# Altium PCB AVR8.PcbDoc
Units mm, origin at the board's own origin, x right, y up, seen from the top; angles counter-clockwise.
Board outline 57.78 x 81.01 mm, 2 copper layers (Top Layer, Bottom Layer); 57 components, 58 nets, 205 pads, 57 vias.
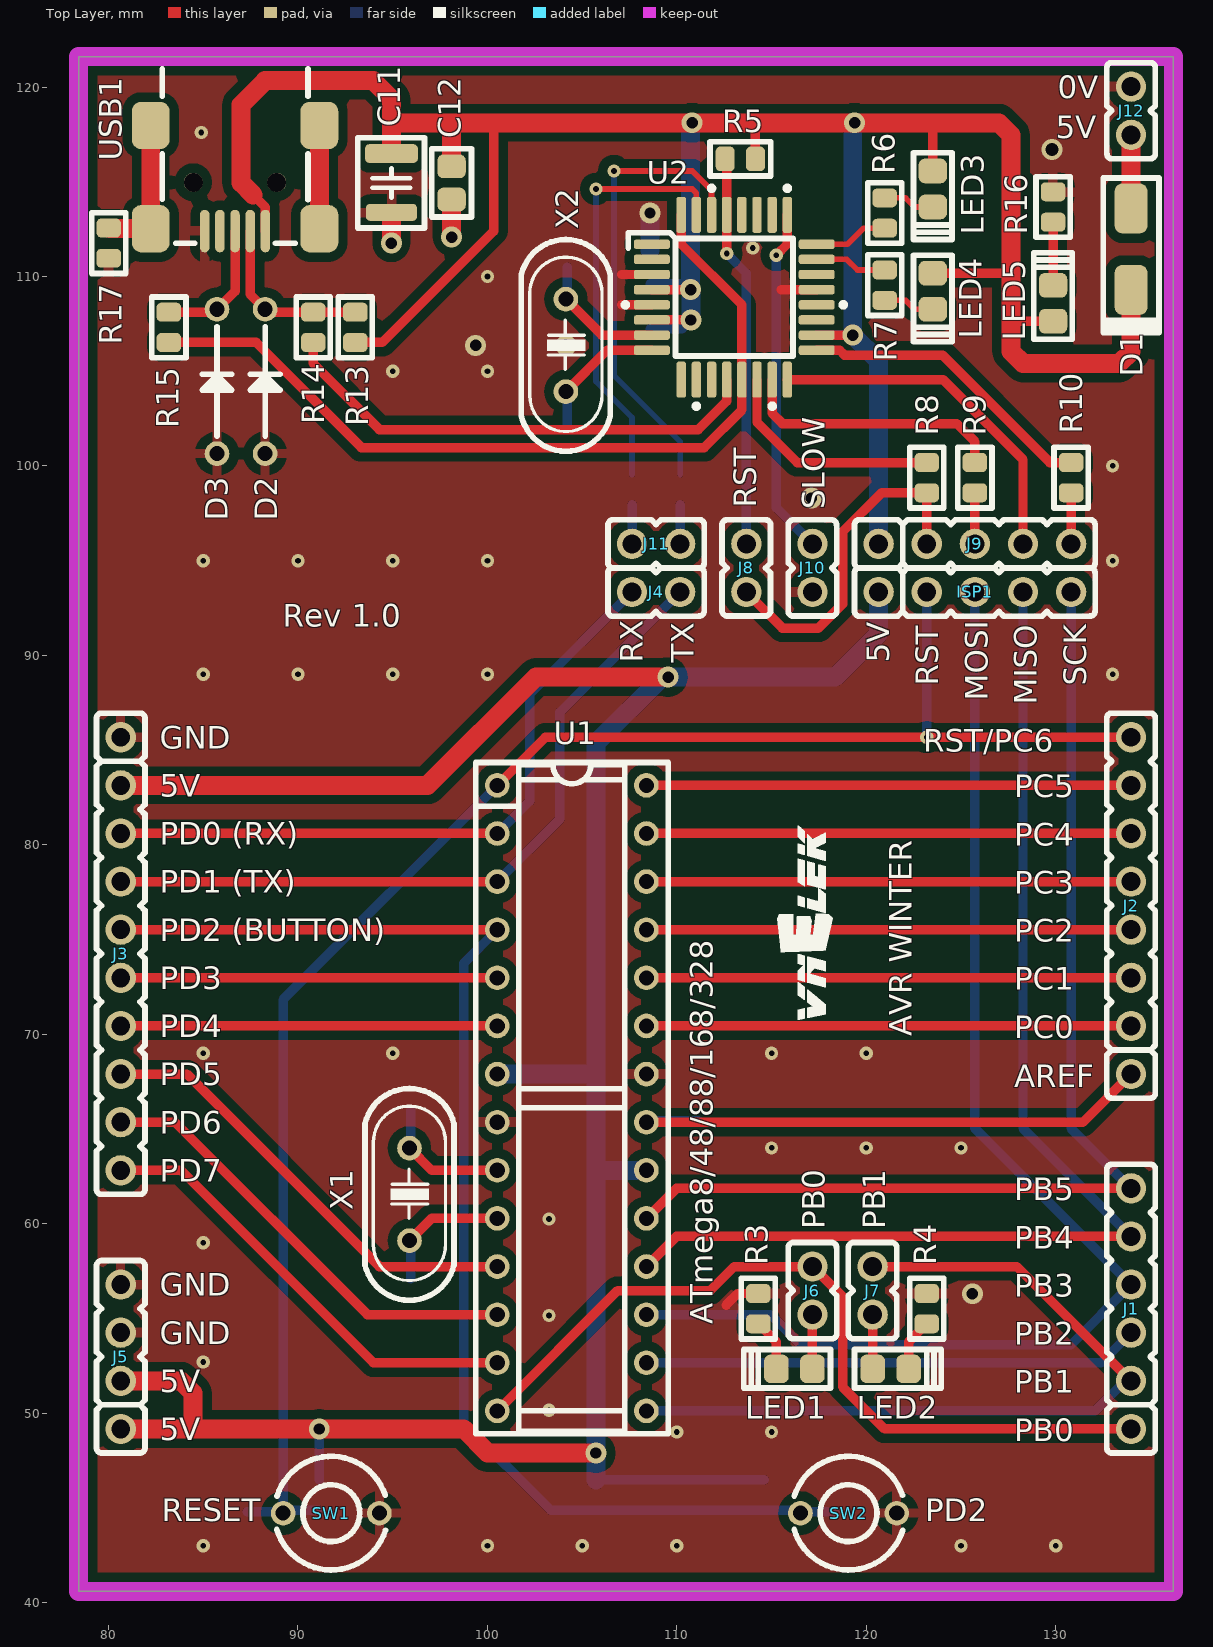
[diagram p0: Top Layer view]
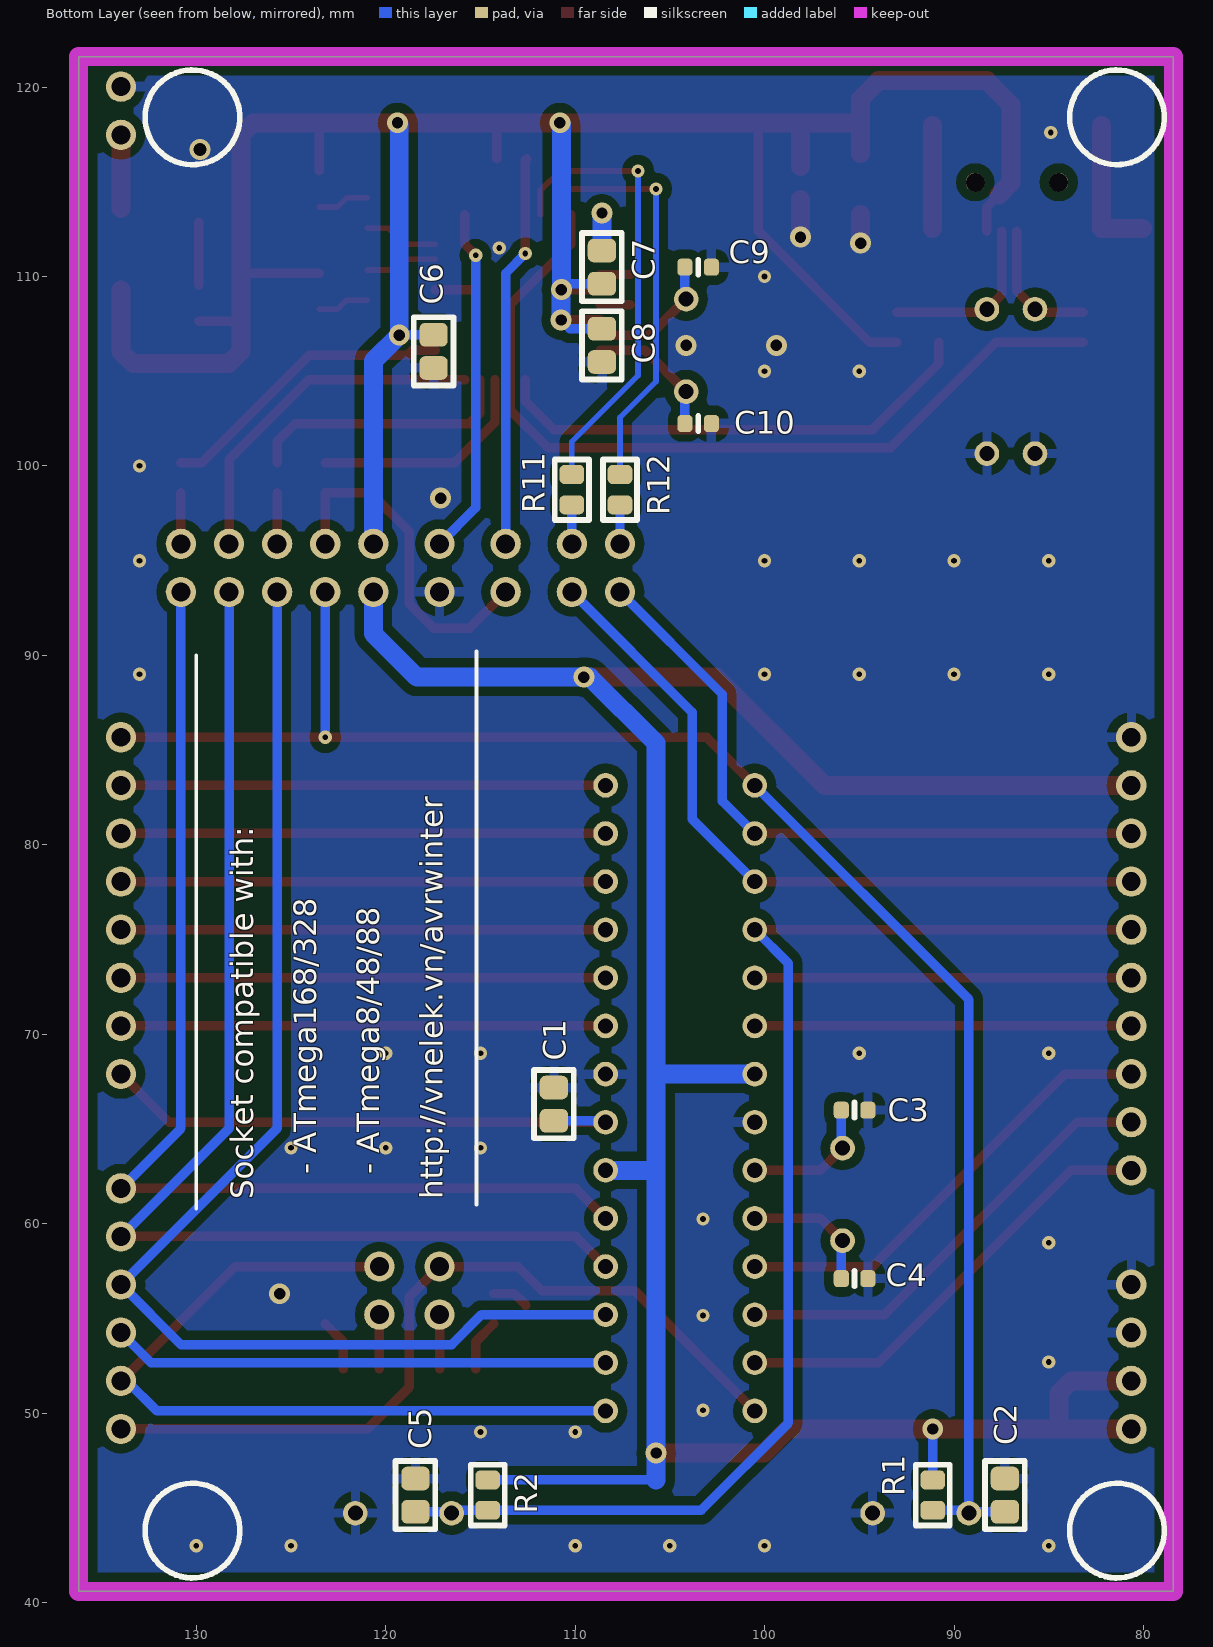
[diagram p1: Bottom Layer view, seen from below]
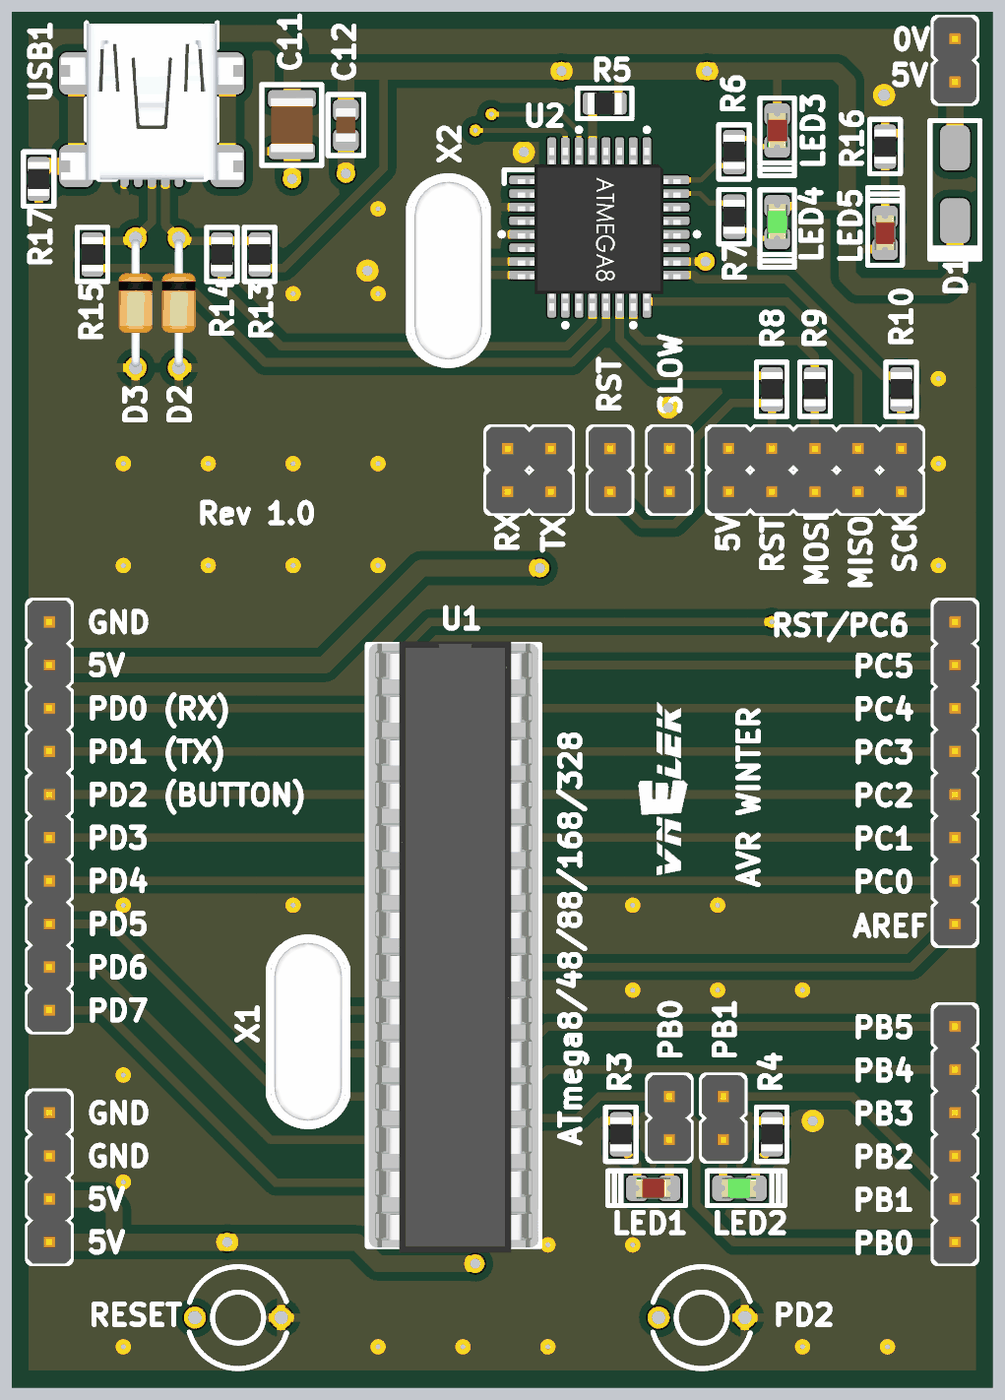
[diagram p2: 3D render of the assembled board from above, using the file's embedded part models]
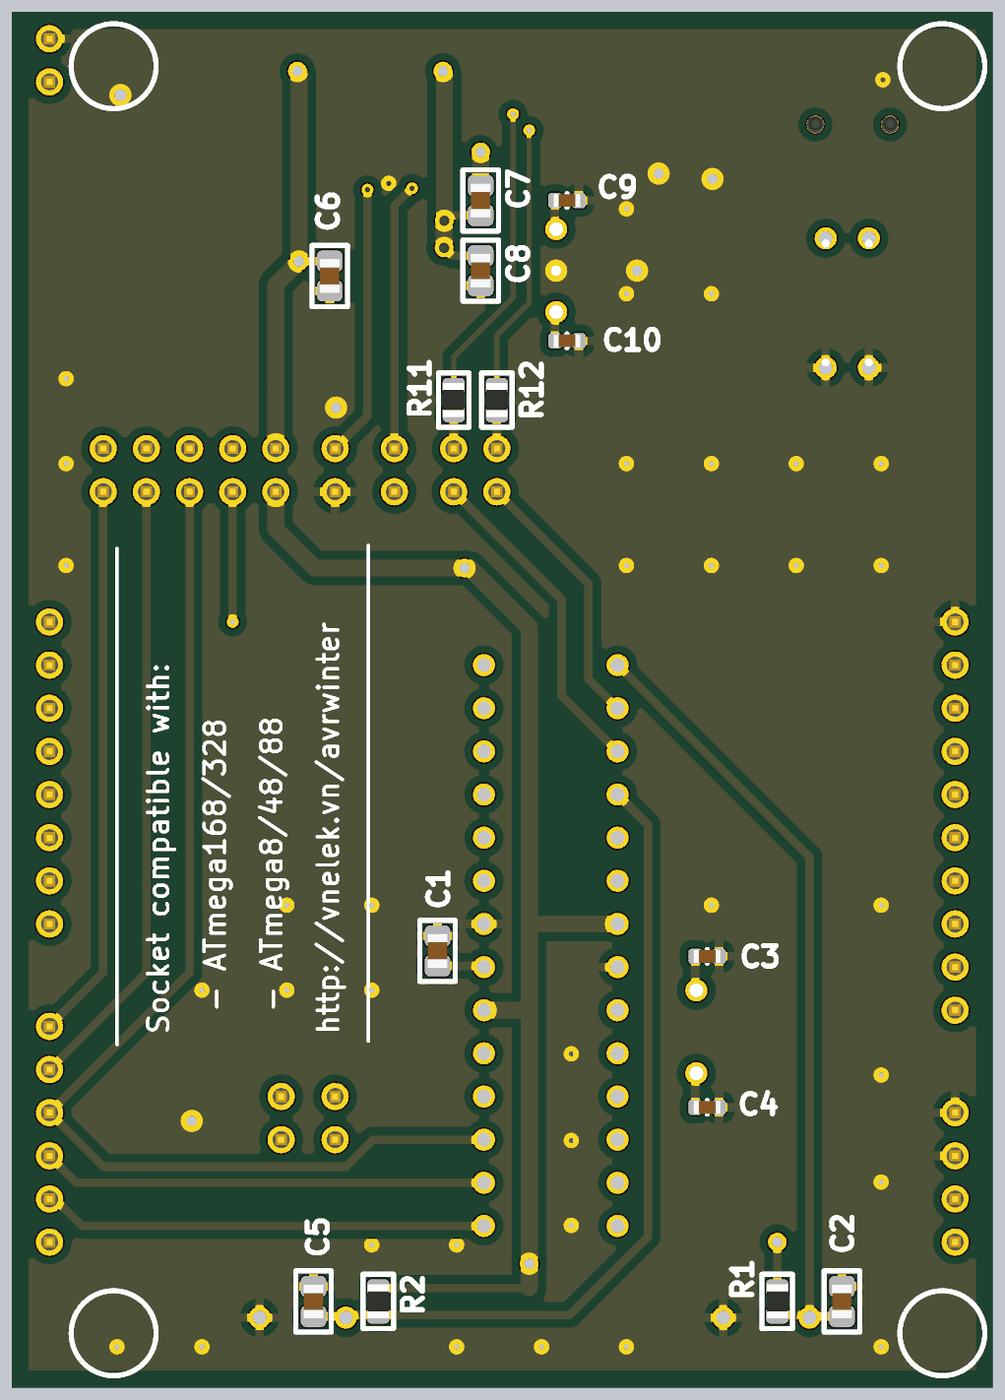
[diagram p3: 3D render of the assembled board from below, using the file's embedded part models]

## Layer stack, top to bottom
Top Layer: signal copper 0.0356
Dielectric: dielectric 0.32, FR-4, Dk 4.8
Bottom Layer: signal copper 0.0356

## Board outline
78.422,40.592 136.207,40.592 136.207,121.602 78.422,121.602

## Design rules (kind name [scope] priority, off if disabled: settings)
Clearance [All] p1: gap=0.5
PlaneClearance [All] p1: clearance=0.5
PlaneConnect [All] p1: planeconnectstyle=Relief reliefexpansion=0.5 reliefentries=4 reliefconductorwidth=0.5 reliefairgap=0.3
PolygonConnect PolygonConnect_1 [isvia] p1: connectstyle=Direct reliefconductorwidth=0.5 reliefentries=4 polygonreliefangle="90 Angle"
PolygonConnect [All] p2: connectstyle=Relief reliefconductorwidth=0.5 reliefentries=4 polygonreliefangle="90 Angle"
RoutingVias [All] p1: holewidth=0.3 width=0.7 viastyle="Through Hole" minholewidth=0.3 minwidth=0.7 maxholewidth=0.6 maxwidth=1.1
SilkscreenOverComponentPads SilkToSolderMaskClearance [IsPad] p1: minsilkscreentomaskgap=0.254
SolderMaskExpansion [All] p1: expansion=0.102
Width [All] p1: maxlimit=1 minlimit=0.3 preferedwidth=0.5
25 further rules are at their usual default settings.

## Classes and differential pairs
component class "AVR8 RedBoard": C1 C2 C3 C4 C5 ISP1 J1 J2 J3 J4 J5 J6 J7 LED1 LED2 R1 R2 R3 R4 SW1 SW2 U1 X1
component class "AVR Programmer": C6 C7 C8 C9 C10 C11 C12 D1 D2 D3 J8 J9 J10 J11 J12 LED3 LED4 LED5 R5 R6 R7 R8 R9 R10 R11 R12 R13 R14 R15 R16 R17 U2 USB1 X2

## Components (designator, comment, footprint, x,y, rotation, side; value= is the part's Value field where it differs from the comment)
C1 "100nF" C0805 111.125,66.31 r270 bottom
C2 "100nF" C0805 87.312,45.672 r90 bottom
C3 "22pF" C0603 95.25,65.992 r0 bottom
C4 "22pF" C0603 95.25,57.102 r0 bottom
C5 "100nF" C0805 118.427,45.672 r90 bottom
C6 "104" C0805 117.475,106.045 r90 bottom
C7 "104" C0805 108.585,110.49 r270 bottom
C8 "104" C0805 108.585,106.362 r90 bottom
C9 "22pF" C0603 103.505,110.49 r0 bottom
C10 "22pF" C0603 103.505,102.235 r0 bottom
C11 "4.7uF" C1210 94.932,114.935 r270 top
C12 "104" C0805 98.108,114.935 r90 top
D1 "SS14" SS14 133.975,111.442 r270 top
D2 "3V6" 1N5226 88.265,104.457 r90 top
D3 "3V6" 1N5226 85.725,104.457 r90 top
ISP1 "ISP" Header_5 125.73,93.345 r0 top
J1 "PORTB" Header_6 133.976,55.515 r90 top
J2 "PORTC" Header_8 133.976,76.787 r90 top
J3 "PORTD" Header_10 80.645,74.247 r270 top
J4 "Serial" Header_2 108.902,93.345 r0 top
J5 "POWER" Header_4 80.645,52.975 r90 top
J6 "PB0" Header_2 117.157,56.467 r90 top
J7 "PB1" Header_2 120.332,56.467 r90 top
J8 "Update" Header_2 113.665,94.615 r270 top
J9 "ISP" Header_5 125.73,95.885 r0 top
J10 "Speed" Header_2 117.157,94.615 r90 top
J11 "Serial" Header_2 108.902,95.885 r180 top
J12 "5VDC" Header_2 133.975,118.745 r270 top
LED1 "RED" "Led 0805R" 116.205,52.34 r180 top
LED2 "GREEN" "Led 0805G" 121.285,52.34 r0 top
LED3 "RED" "Led 0805R" 123.507,114.617 r270 top
LED4 "GREEN" "Led 0805G" 123.507,109.22 r270 top
LED5 "RED" "Led 0805R" 129.857,108.585 r90 top
R1 "Res2" RESC2012(0805) 91.123,45.672 r90 bottom
R2 "Res2" RESC2012(0805) 114.617,45.672 r90 bottom
R3 "Res2" RESC2012(0805) 114.3,55.515 r90 top
R4 "Res2" RESC2012(0805) 123.19,55.515 r90 top
R5 "Res2" RESC2012(0805) 113.347,116.205 r0 top
R6 "Res2" RESC2012(0805) 120.968,113.347 r270 top
R7 "Res2" RESC2012(0805) 120.968,109.537 r90 top
R8 "Res2" RESC2012(0805) 123.19,99.377 r270 top
R9 "Res2" RESC2012(0805) 125.73,99.377 r270 top
R10 "Res2" RESC2012(0805) 130.81,99.377 r270 top
R11 "Res2" RESC2012(0805) 110.172,98.742 r270 bottom
R12 "Res2" RESC2012(0805) 107.632,98.742 r270 bottom
R13 "Res2" RESC2012(0805) 93.027,107.315 r90 top
R14 "Res2" RESC2012(0805) 90.805,107.315 r90 top
R15 "Res2" RESC2012(0805) 83.185,107.315 r90 top
R16 "Res2" RESC2012(0805) 129.857,113.665 r90 top
R17 "Res2" RESC2012(0805) 80.01,111.76 r270 top
SW1 "RESET" "BUTTON 2PIN TRON" 89.218,44.72 r0 top
SW2 "PD2" "BUTTON 2PIN TRON" 116.522,44.72 r0 top
U1 "ATmega8/48/88/168/328" SOCKET_28 104.457,66.627 r270 top
U2 "ATmega8-SMD" ATMEGA_8_SMD 113.03,108.902 r270 top
USB1 "USB_MINI" USBMNIB 86.677,112.395 r180 top
X1 "12Mhz" CRYSTAL 95.885,61.547 r270 top
X2 "12Mhz" CRYSTAL 104.14,106.362 r270 top

## Footprints (in the part's own frame and the unit in brackets; to place one, negate y for a bottom-side part, rotate by r counter-clockwise, add the part's x,y. Pads: shape width x height; smd on the part's side, far side on the other; paste and mask are expansions set on the pad)
1N5226 [mm] "DIODE_ZENER"
  round 1.3 hole 0.8 mask+0.1: 1(-3.81,0)
  round 1.3 hole 0.8: 2(3.81,0)
  silkscreen extent -2.88,-0.79 2.89,0.79, body extent -3.75,-1 3.75,1, height 2.5
ATMEGA_8_SMD [mm] "32A,32-lead, 7 x 7mm body size, 1.0mm body"
  rrect50% 0.5x1.9 smd mask+0.1: 1(-2.8,-4.35) 2(-2,-4.35) 3(-1.2,-4.35) 4(-0.4,-4.35) 5(0.4,-4.35) 6(1.2,-4.35) 7(2,-4.35) 8(2.8,-4.35) 17(2.8,4.35) 18(2,4.35) 19(1.2,4.35) 20(0.4,4.35) 21(-0.4,4.35) 22(-1.2,4.35) 23(-2,4.35) 24(-2.8,4.35)
  rrect50% 1.9x0.5 smd mask+0.1: 9(4.35,-2.8) 10(4.35,-2) 11(4.35,-1.2) 12(4.35,-0.4) 13(4.35,0.4) 14(4.35,1.2) 15(4.35,2) 16(4.35,2.8) 25(-4.35,2.8) 26(-4.35,2) 27(-4.35,1.2) 28(-4.35,0.4) 29(-4.35,-0.4) 30(-4.35,-1.2) 31(-4.35,-2) 32(-4.35,-2.8)
  silkscreen extent -5.85,-5.85 5.85,5.85, body extent -4.7,-4.81 4.9,4.79, height 1.1
"BUTTON 2PIN TRON" [mm] "PIN TO PIN 5.08, W=6MM"
  round 1.3 hole 0.8: 1(0,0) 2(5.08,0)
  silkscreen extent -0.33,-3 5.4,3
C0603 [mm] "Chip Capacitor, Body 1.6x0.8mm, 1608"
  rrect50% 0.8x0.9 smd: 1(-0.7,0) 2(0.7,0)
  silkscreen extent 0,-0.4 0,0.4, body extent -0.8,-0.4 0.8,0.4, height 0.6
C0805 [mm] "Chip Capacitor, 2-Leads, Body 2.0x1.3mm, IPC Medium Density"
  rrect50% 1.25x1.5 smd: 1(-0.875,0) 2(0.875,0)
  silkscreen extent -1.8,-1.05 1.8,1.05, body extent -1,-0.6 1,0.6, height 0.95
C1210 [mm] "CC1210KKX7R6  BB476"
  rrect50% 1x2.8 smd: 1(-1.55,0)
  rrect50% 0.9x2.7 smd: 2(1.55,0)
  silkscreen extent -2.38,-1.78 2.38,1.75, body extent -1.59,-1.25 1.61,1.25, height 1.3
CRYSTAL [mm] "Quartz Crystal, Thru-Hole; 2 Leads; Body 11.35 x 4.65 x 13.46 mm (LxWxH max)"
  round 1.3 hole 0.8 mask+0.1: 1(-2.44,0) 2(2.44,0)
  silkscreen extent -5.59,-2.35 5.59,2.35, body extent -5.49,-2.25 5.49,2.25, height 3.6
Header_2 [mm] "Connector DIP, 2Pin_2.54mm"
  round 1.6 hole 1 mask+0.1: 1(-1.27,0) 2(1.27,0)
  silkscreen extent -2.54,-1.28 2.54,1.28, body extent -2.54,-1.27 2.54,1.27, height 10.1
Header_4 [mm] "Connector DIP, 4Pin_2.54mm"
  round 1.6 hole 1 mask+0.1: 1(-3.81,0) 2(-1.27,0) 3(1.27,0) 4(3.81,0)
  silkscreen extent -5.08,-1.28 5.08,1.28, body extent -5.08,-1.27 5.08,1.27, height 10.1
Header_5 [mm] "Connector DIP, 5Pin_2.54mm"
  round 1.6 hole 1 mask+0.1: 1(-5.08,0) 2(-2.54,0) 3(0,0) 4(2.54,0) 5(5.08,0)
  silkscreen extent -6.35,-1.28 6.35,1.28, body extent -6.35,-1.27 6.35,1.27, height 10.1
Header_6 [mm] "Connector DIP Male, 6Pin_2.54mm"
  round 1.6 hole 1 mask+0.1: 1(-6.35,0) 2(-3.81,0) 3(-1.27,0) 4(1.27,0) 5(3.81,0) 6(6.35,0)
  silkscreen extent -7.62,-1.28 7.62,1.28, body extent -7.62,-1.27 7.62,1.27, height 10.1
Header_8 [mm] "Connector DIP Male, 8Pin_2.54mm"
  round 1.6 hole 1 mask+0.1: 1(-8.89,0) 2(-6.35,0) 3(-3.81,0) 4(-1.27,0) 5(1.27,0) 6(3.81,0) 7(6.35,0) 8(8.89,0)
  silkscreen extent -10.16,-1.28 10.16,1.28, body extent -10.16,-1.27 10.16,1.27, height 10.1
Header_10 [mm] "Connector DIP Male, 10Pin_2.54mm"
  round 1.6 hole 1 mask+0.1: 1(-11.43,0) 2(-8.89,0) 3(-6.35,0) 4(-3.81,0) 5(-1.27,0) 6(1.27,0) 7(3.81,0) 8(6.35,0) 9(8.89,0) 10(11.43,0)
  silkscreen extent -12.7,-1.28 12.7,1.28, body extent -12.7,-1.27 12.7,1.27, height 10.1
"Led 0805G" [mm] "Chip LED; Green; Body 2.0 x 1.3 mm (LxW typ)"
  rrect50% 1.3x1.5 smd: 1(-0.95,0) 2(0.95,0)
  silkscreen extent -1.91,-1.02 2.67,1.02, body extent -1.04,-0.62 0.98,0.62, height 1.1
"Led 0805R" [mm] "Chip LED; RED ; Body 2.0 x 1.3 mm (LxW typ)"
  rrect50% 1.3x1.5 smd: 1(-0.95,0) 2(0.95,0)
  silkscreen extent -1.91,-1.02 2.67,1.02, body extent -1.01,-0.63 1.01,0.62, height 1.1
RESC2012(0805) [mm] "Chip Resistor, Body 2.0x1.3mm, 1/8W 0805"
  rrect50% 1x1.3 smd: 1(-0.8,0) 2(0.8,0)
  silkscreen extent -1.6,-0.9 1.6,0.9, body extent -1,-0.63 1,0.62, height 0.6
SOCKET_28 [mm] "DIP 28, w7.62, PIN TO PIN 2.54"
  round 1.3 hole 0.8: 1(-16.51,-3.935) 2(-13.97,-3.935) 3(-11.43,-3.935) 4(-8.89,-3.935) 5(-6.35,-3.935) 6(-3.81,-3.935) 7(-1.27,-3.935) 8(1.27,-3.935) 9(3.81,-3.935) 10(6.35,-3.935) 11(8.89,-3.935) 12(11.43,-3.935) 13(13.97,-3.935) 14(16.51,-3.935) 15(16.51,3.935) 16(13.97,3.935) 17(11.43,3.935) 18(8.89,3.935) 19(6.35,3.935) 20(3.81,3.935) 21(1.27,3.935) 22(-1.27,3.935) 23(-3.81,3.935) 24(-6.35,3.935) 25(-8.89,3.935) 26(-11.43,3.935) 27(-13.97,3.935) 28(-16.51,3.935)
  silkscreen extent -17.71,-5.08 17.71,5.08, body extent -17.91,-5 18.09,5, height 9.08
SS14 [mm] "Diode SMD"
  rrect50% 2.65x1.75 smd: 1(-2.15,0) 2(2.15,0)
  silkscreen extent -3.75,-1.48 4.4,1.48
USBMNIB [mm] "9.2mmX7.75mm"
  oval 0.5x2.25 smd: 1(-1.6,0) 2(-0.8,0) 3(0,0) 4(0.8,0) 5(1.6,0)
  rrect50% 2x2.5 smd: 6(-4.45,-0.125) 7(4.45,-0.125) 8(-4.45,-5.575) 9(4.45,-5.575)
  round 1 hole 1 mask+0.1: HOLE1(-2.2,-2.57) HOLE2(2.2,-2.57)
  silkscreen extent -3.85,-8.55 3.85,0.64, body extent -5.35,-8.52 5.35,0.68, height 3.95

## Part data
C1 C2 C3 C4 C5 C9 C10: library part CN1, "Cap np  1pF - 472pF"
C6 C7 C8 C12: library part CN2, "Cap np 104 => 105pF"
C11: library part CP1, "Cap P  0,1uF < 22uF , 16 - 50V"
D1: library part D1A, "Diode 1A"
D2 D3: library part DZ, "Diode Zenner"
ISP1 J9: library part Hed5, "Header 5 (Green)"
J1: library part Hed6, "Header 6"
J2: library part Hed8, "Hedear 8"
J3: library part Hed10, "Header 10"
J4 J6 J7 J8 J10 J11 J12: library part Hed2, "Header 2 (Green)"
J5: library part Hed4, "Header 4 (Green)"
LED1 LED2 LED3 LED4 LED5: library part LED, "LED Single colour Green and Red"
R1 R2 R3 R4 R5 R6 R7 R8 R9 R10 R11 R12 R13 R14 R15 R16 R17: "Resistor"
SW1 SW2: library part SW2, "Switch button 2 pin"
U1: library part ATmega8-L, "8-Bit AVR Microcontroller with 8K Bytes of In-System Programmable Flash Memory"
U2: library part ATmega8_SMD_32pin, "High-performance, Low-power Atmel  ®  AVR  ®   8-bit Microcontroller"
X1 X2: library part XT2, "Crystal For all Crystal 2pin."

## Via types
v1: diameter 0.7, hole 0.3, Top Layer to Bottom Layer, 41 vias
v2: diameter 1.1, hole 0.6, Top Layer to Bottom Layer, 15 vias
v3: diameter 1.1, hole 0.7, Top Layer to Bottom Layer, 1 vias

## Nets (pads, with @x,y where several pads share a name; then routed paths per layer and width w, separated by ;. In a path a pad name is that pad's centre, name@x,y a point inside that pad or via, vN(x,y) a via of type N, cw(c..) or ccw(c..) an arc to the next point about the centre after c; other vN are vias at no path point)
5V: ISP1.1 J3.2 J5.1 J5.2 R1.2 R2.2 U1.7 U1.20 | length 140.7
  Top Layer w1: J5.1 84.455,49.165 ; J5.2 83.82,51.705 84.455,51.07 84.455,49.165 ; J3.2 96.837,83.137 102.552,88.852 v2(109.537,88.852) ; v2(105.727,47.895) 100.013,47.895 98.742,49.165 v2(91.123,49.165) 84.455,49.165
  Bottom Layer w0.5: R1.2 v2(91.123,49.165) ; 105.727,46.473 R2.2
  Bottom Layer w1: U1.7 105.727,67.897 ; 105.727,46.473 v2(105.727,47.895) 105.727,62.817 ; U1.20 105.727,62.817 ; ISP1.1 120.65,91.15 118.352,88.852 v2(109.537,88.852) 109.22,88.852 105.727,85.36 105.727,67.897 ; 105.727,62.817 105.727,67.897
AREF: C1.2 J2.1 U1.21 | length 29.4
  Top Layer w0.5: U1.21 131.436,65.357 J2.1
  Bottom Layer w0.5: U1.21 108.47,65.435 C1.2
BUTTON: C5.1 J3.5 R2.1 SW2.1 U1.4 | length 68.4
  Top Layer w0.5: J3.5 U1.4
  Bottom Layer w0.5: U1.4 98.742,73.737 98.742,49.482 103.352,44.873 R2.1 SW2.1@116.37,44.873 ; SW2.1 SW2.1@116.762,44.48 ; SW2.1@116.6,44.797 C5.1
GND: C1.1 C2.2 C3.1 C4.1 C5.2 C6.1 C7.1 C8.1 C9.1 C10.1 C11.2 C12.1 D2.1 D3.1 J3.1 J5.3 J5.4 J10.1 J12.1 R3.2 R4.2 R16.2 R17.2 SW1.2 SW2.2 U1.8 U1.22 U2.3 U2.5 U2.21 USB1.5 | length 12.5
  Top Layer w0.5: 107.102,108.502 U2.5 ; 107.102,110.102 U2.3 ; 112.6,55.7 113.215,56.315 R3.2 ; 115.502,109.302 U2.21
  Top Layer w1: v2(94.932,111.76) C11.2@94.932,113.27 ; v2(98.108,112.078) C12.1
  Bottom Layer w1: C7.1 v2(108.585,113.347)
  other v1: 85,43 100,43 105,43 110,43 125,43 130,43 110,49 115,49 103.25,50.15 85,52.7 103.25,55.15 85,59 103.25,60.25 115,64 120,64 125,64 85,69 95,69 115,69 120,69 85,89 90,89 95,89 100,89 133,89 85,95 90,95 95,95 100,95 133,95 133,100 95,105 100,105 100,110 114,111.5 84.9,117.6
  other v2: 125.6,56.3 117.1,98.3 99.377,106.362 104.14,106.362
  other v3: 129.8,116.7
MISO: ISP1.4 J1.5 U1.18 | length 62.6
  Top Layer w0.5: U1.18 109.98,59.325 J1.5
  Bottom Layer w0.5: ISP1.4 128.27,65.03 J1.5
MOSI: ISP1.3 J1.4 U1.17 | length 67.5
  Bottom Layer w0.5: U1.17 114.935,55.197 116.522,53.61 130.801,53.61 J1.4 125.73,65.03 ISP1.3
NetD1_1: D1.1 J12.2 | length 3.9
  Top Layer w1: D1.1 J12.2
NetD2_2: D2.2 R13.2 R14.2 USB1.2 | length 9.3
  Top Layer w0.5: USB1.2 87.478,109.055 D2.2 88.417,108.115 R14.2 R13.2
NetD3_2: D3.2 R15.2 USB1.3 | length 7.1
  Top Layer w0.5: R15.2 85.573,108.115 D3.2 86.677,109.22 USB1.3
NetJ1_3: J1.3 U1.16 | length 26.2
  Bottom Layer w0.5: U1.16 132.388,52.657 J1.3
NetJ2_2: J2.2 U1.23 | length 25.6
  Top Layer w0.5: U1.23 J2.2
NetJ2_3: J2.3 U1.24 | length 25.6
  Top Layer w0.5: U1.24 J2.3
NetJ2_4: J2.4 U1.25 | length 25.6
  Top Layer w0.5: U1.25 J2.4
NetJ2_5: J2.5 U1.26 | length 25.6
  Top Layer w0.5: U1.26 J2.5
NetJ2_6: J2.6 U1.27 | length 25.6
  Top Layer w0.5: U1.27 J2.6
NetJ2_7: J2.7 U1.28 | length 25.6
  Top Layer w0.5: U1.28 J2.7
NetJ3_6: J3.6 U1.5 | length 19.9
  Top Layer w0.5: J3.6 U1.5
NetJ3_7: J3.7 U1.6 | length 19.9
  Top Layer w0.5: J3.7 U1.6
NetJ3_8: J3.8 U1.11 | length 24.1
  Top Layer w0.5: J3.8 84.138,67.897 94.297,57.737 U1.11
NetJ3_9: J3.9 U1.12 | length 24.1
  Top Layer w0.5: J3.9 83.502,65.357 93.662,55.197 U1.12
NetJ3_10: J3.10 U1.13 | length 24.1
  Top Layer w0.5: J3.10 83.82,62.817 93.98,52.657 U1.13
NetJ6_1: J6.1 LED1.1 | length 2.9
  Top Layer w0.5: LED1.1 117.155,55.195 J6.1
NetJ7_1: J7.1 LED2.1 | length 2.9
  Top Layer w0.5: J7.1 120.335,55.195 LED2.1
NetLED1_2: LED1.2 R3.1 | length 2.8
  Top Layer w0.5: R3.1 115.255,53.76 LED1.2
NetLED2_2: LED2.2 R4.1 | length 2.8
  Top Layer w0.5: LED2.2 122.235,53.76 R4.1
NetLED3_2: LED3.2 R6.1 | length 2.7
  Top Layer w0.3: R6.1 122.073,114.147 122.553,113.667 LED3.2
NetLED4_2: LED4.2 R7.1 | length 2.7
  Top Layer w0.3: R7.1 122.085,108.738 122.553,108.27 LED4.2
NetLED5_2: LED5.2 R16.1 | length 3.3
  Top Layer w0.5: LED5.2 R16.1
NetR17_1: R17.1 USB1.7 USB1.9 | length 7.6
  Top Layer w1: R17.1@80.05,112.52 USB1.7 USB1.9
NetUSB1_6: USB1.6 USB1.8 | length 5.4
  Top Layer w1: USB1.6 USB1.8
P.GREEN: R7.2 U2.23 | length 3.8
  Top Layer w0.3: U2.23 118.968,110.902 119.532,110.338 R7.2
P.MISO: J9.4 U2.16 | length 18.6
  Top Layer w0.5: U2.16 124.048,104.552 128.27,100.33 J9.4
P.MOSI: J9.3 R9.2 | length 2.7
  Top Layer w0.5: J9.3 R9.2
P.PB2: R8.1 U2.14 | length 12.1
  Top Layer w0.5: U2.14 114.23,102.305 116.358,100.177 R8.1
P.PB3: R9.1 U2.15 | length 14.2
  Top Layer w0.5: U2.15 115.03,102.775 115.57,102.235 124.777,102.235 125.73,101.282 R9.1
P.PB5: R10.1 U2.17 | length 15.9
  Top Layer w0.5: U2.17 118.594,106.102 118.848,105.848 124.022,105.848 129.693,100.177 R10.1
P.PD0: R11.1 U2.30 | length 24.3
  Top Layer w0.3: v1(106.68,115.57) 110.807,115.57 111.83,114.548 U2.30
  Bottom Layer w0.3: v1(106.68,115.57) 106.68,104.775 110.172,101.282 R11.1
P.PD1: R12.1 U2.31 | length 22.4
  Top Layer w0.3: v1(105.727,114.617) 110.807,114.617 111.03,114.395 U2.31
  Bottom Layer w0.3: v1(105.727,114.617) 105.727,104.457 107.632,102.552 R12.1
P.RED: R6.2 U2.24 | length 3.9
  Top Layer w0.3: U2.24 119.005,111.702 119.85,112.547 R6.2
P.RESET: J8.2 J9.2 R8.2 | length 18.2
  Top Layer w0.5: J8.2 115.57,91.44 117.475,91.44 118.745,92.71 118.745,96.52 120.802,98.577 R8.2 J9.2
P.RESET1: J8.1 R5.1 U2.29 | length 20.8
  Top Layer w0.5: R5.1 112.63,116.123 U2.29 v1(112.63,111.207)
  Bottom Layer w0.5: v1(112.63,111.207) 113.665,110.172 J8.1
P.RX: J11.1 R11.2 | length 2.1
  Bottom Layer w0.5: J11.1 R11.2
P.SCK: J9.5 R10.2 | length 2.7
  Top Layer w0.5: J9.5 R10.2
P.SPEED: J10.2 U2.25 | length 18.4
  Top Layer w0.5: v1(115.252,111.125) 115.83,111.702 U2.25
  Bottom Layer w0.5: v1(115.252,111.125) 115.252,97.79 J10.2
P.TX: J11.2 R12.2 | length 2.1
  Bottom Layer w0.5: J11.2 R12.2
P.USB+: R15.1 U2.13 U2.32 | length 45
  Top Layer w0.5: R15.1 87.795,106.515 93.345,100.965 111.442,100.965 113.43,102.952 U2.13 113.43,108.503 110.23,111.702 U2.32
P.USB-: R14.1 U2.12 | length 26.1
  Top Layer w0.5: R14.1 90.805,105.41 94.297,101.917 111.125,101.917 112.63,103.423 U2.12
P.VCC: C6.2 C7.2 C8.2 C11.1 C12.2 D1.2 J9.1 LED3.1 LED4.1 LED5.1 R5.2 R13.1 U2.4 U2.6 U2.18 USB1.1 | length 150.8
  Top Layer w0.5: 87.63,114.3 88.278,113.652 USB1.1 ; R13.1 94.45,106.515 100.33,112.395 100.33,118.11 ; U2.6 v2(110.738,107.702) ; U2.4 v2(110.725,109.302) ; 113.983,118.11 114.148,117.945 R5.2 ; U2.18 v2(119.285,106.902) ; LED4.1 127.632,110.17 ; LED3.1 123.507,118.11 ; 127.635,107.632 127.638,107.635 LED5.1 LED5.1@129.855,107.632
  Top Layer w1: 87.63,114.3 86.995,114.935 86.995,119.062 88.265,120.332 93.98,120.332 94.932,119.38 94.932,118.11 ; C11.1 94.932,118.11 ; C12.2 98.108,118.11 94.932,118.11 ; D1.2 133.975,106.035 133.35,105.41 128.27,105.41 127.635,106.045 127.635,107.632 127.635,117.475 127,118.11 123.507,118.11 v2(119.38,118.11) 113.983,118.11 v2(110.807,118.11) 100.33,118.11 94.932,118.11
  Bottom Layer w0.5: C8.2 110.273,107.237 v2(110.738,107.702) ; C7.2 110.412,109.615 v2(110.725,109.302) ; C6.2 119.267,106.92 v2(119.285,106.902)
  Bottom Layer w1: v2(110.738,107.702) 110.738,109.29 v2(110.725,109.302) 110.725,118.028 v2(110.807,118.11) ; v2@119.285,118.015 v2(119.285,106.902) 120.65,105.537 J9.1
P.XTAL1: C9.2 U2.7 X2.1 | length 7
  Top Layer w0.5: X2.1 106.04,106.902 U2.7
  Bottom Layer w0.5: X2.1 104.205,108.868 C9.2
P.XTAL2: C10.2 U2.8 X2.2 | length 7.2
  Top Layer w0.5: X2.2 106.32,106.102 U2.8
  Bottom Layer w0.5: X2.2 104.205,103.857 C10.2
PB0: J1.1 J6.2 U1.14 | length 42.9
  Top Layer w0.5: U1.14 106.873,56.467 111.76,56.467 113.03,57.737 J6.2 118.745,56.15 118.745,51.387 120.968,49.165 J1.1
PB1: J1.2 J7.2 U1.15 | length 42.4
  Top Layer w0.5: J7.2 127.943,57.737 J1.2
  Bottom Layer w0.5: U1.15 132.08,50.117 133.667,51.705 J1.2
RESET: C2.1 ISP1.2 J2.8 R1.1 SW1.1 U1.1 | length 89.2
  Top Layer w0.5: U1.1 103.063,85.677 v1(123.19,85.677) J2.8
  Bottom Layer w0.5: C2.1 89.14,44.797 SW1.1 ; R1.1 89.37,44.873 SW1.1 ; U1.1 89.218,71.832 SW1.1 ; v1(123.19,85.677) ISP1.2
RX: J3.3 J4.1 U1.2 | length 35.6
  Top Layer w0.5: J3.3 U1.2
  Bottom Layer w0.5: U1.2 102.235,82.31 102.235,87.947 J4.1
SCK: ISP1.5 J1.6 U1.19 | length 59
  Top Layer w0.5: U1.19 109.98,61.865 J1.6
  Bottom Layer w0.5: ISP1.5 130.81,65.03 J1.6
TX: J3.4 J4.2 U1.3 | length 39.2
  Top Layer w0.5: J3.4 U1.3
  Bottom Layer w0.5: U1.3 103.822,81.357 103.822,86.995 J4.2
XTAL1: C3.2 U1.9 X1.1 | length 7.2
  Top Layer w0.5: X1.1 97.055,62.817 U1.9
  Bottom Layer w0.5: X1.1 95.95,64.053 C3.2
XTAL2: C4.2 U1.10 X1.2 | length 7.2
  Top Layer w0.5: X1.2 97.055,60.277 U1.10
  Bottom Layer w0.5: X1.2 95.95,59.042 C4.2
pads on no net: U2.1 U2.2 U2.9 U2.10 U2.11 U2.19 U2.20 U2.22 U2.26 U2.27 U2.28 USB1.4 USB1.HOLE1 USB1.HOLE2

## Polygon pours and split planes (outlines as drawn)
GND on Top Layer "Bottom Overlay-No Net" (solid, remove dead copper, pour order 2): 78.422,121.602 136.207,121.602 136.207,41 78.422,41 78.422,121.602
GND on Bottom Layer "Bottom Overlay-No Net" (solid, remove dead copper, pour order 7): 78.422,121.602 136.207,121.602 136.207,40.4 78.422,40.4 78.422,121.602

## Keep-outs
Keep-Out Layer:
  the board outline again, w1

## Silkscreen, mask and mechanical layers (free items; w line width, h text height)
Top Overlay:
  drawing of 2497 lines, arcs and shapes, not listed
  text "0V" at 130.1,119.4 h1.2
  text "5V" at 130,117.3 h1.2
  text "RST" at 114.2,97.8 h1.2 r90
  text "SLOW" at 117.8,97.7 h1.2 r90
  text "Rev 1.0" at 89.2,91.5 h1.2
  text "RX" at 108.2,89.599 h1.2 r90
  text "TX" at 110.9,89.6 h1.2 r90
  text "5V" at 121.2,89.599 h1.2 r90
  text "RST" at 123.8,88.4 h1.2 r90
  text "SCK" at 131.6,88.4 h1.2 r90
  text "MOSI" at 126.4,87.6 h1.2 r90
  text "MISO" at 129,87.4 h1.2 r90
  text "GND" at 82.7,85.08 h1.2
  text "RST/PC6" at 123,84.9 h1.2
  text "5V" at 82.7,82.54 h1.2
  text "PC5" at 127.8,82.5 h1.2
  text "PD0 (RX)" at 82.7,80 h1.2
  text "PC4" at 127.8,79.96 h1.2
  text "PD1 (TX)" at 82.7,77.46 h1.2
  text "PC3" at 127.8,77.42 h1.2
  text "PD2 (BUTTON)" at 82.7,74.92 h1.2
  text "PC2" at 127.8,74.88 h1.2
  text "PD3" at 82.7,72.38 h1.2
  text "PC1" at 127.8,72.34 h1.2
  text "AVR WINTER" at 122.4,69.9 h1.2 r90
  text "PD4" at 82.7,69.84 h1.2
  text "PC0" at 127.8,69.8 h1.2
  text "PD5" at 82.7,67.3 h1.2
  text "AREF" at 127.8,67.2 h1.2
  text "PD6" at 82.7,64.76 h1.2
  text "PD7" at 82.7,62.22 h1.2
  text "PB5" at 127.8,61.228 h1.2
  text "PB0" at 117.8,59.7 h1.2 r90
  text "PB1" at 121,59.7 h1.2 r90
  text "PB4" at 127.8,58.688 h1.2
  text "GND" at 82.7,56.188 h1.2
  text "PB3" at 127.8,56.148 h1.2
  text "ATmega8/48/88/168/328" at 111.9,54.7 h1.2 r90
  text "GND" at 82.7,53.648 h1.2
  text "PB2" at 127.8,53.608 h1.2
  text "5V" at 82.7,51.108 h1.2
  text "PB1" at 127.8,51.068 h1.2
  text "5V" at 82.7,48.568 h1.2
  text "PB0" at 127.8,48.528 h1.2
  text "RESET" at 82.8,44.3 h1.2
  text "PD2" at 123.1,44.3 h1.2
Bottom Overlay:
  circle w0.3: c81.4,43.8 r2.5
  circle w0.3: c81.4,118.4 r2.5
  circle w0.3: c130.2,118.4 r2.5
  circle w0.3: c130.2,43.8 r2.5
  lines w0.2: 115.2,61 115.2,90.2 ; 130,60.8 130,90
  text "- ATmega8/48/88" at 120.333,62.6 h1.2 r270
  text "- ATmega168/328" at 123.667,62.6 h1.2 r270
  text "http://vnelek.vn/avrwinter" at 117,61.3 h1.2 r270
  text "Socket compatible with:" at 127,61.3 h1.2 r270

## Dimensions
78.422,121.602 to 136.207,121.602 on Mechanical 1
78.422,121.602 to 78.422,40.592 on Mechanical 1

## Text inside footprints (layer, text, board x,y; h text height)
ISP1: Mechanical 1 "1" at 120.396,93.091 h1.2; Mechanical 1 "5" at 130.556,93.091 h1.2
J1: Mechanical 1 "6" at 134.376,61.615 h1.2 r90; Mechanical 1 "1" at 134.376,48.915 h1.2 r90
J2: Mechanical 1 "1" at 134.375,67.687 h1.2 r90; Mechanical 1 "8" at 134.376,85.388 h1.2 r90
J3: Mechanical 1 "1" at 80.245,85.847 h1.2 r270; Mechanical 1 "10" at 80.245,63.347 h1.2 r270
J4: Mechanical 1 "1" at 107.379,93.091 h1.2; Mechanical 1 "2" at 109.918,93.091 h1.2
J5: Mechanical 1 "4" at 80.899,56.531 h1.2 r90; Mechanical 1 "1" at 80.899,48.911 h1.2 r90
J6: Mechanical 1 "1" at 117.411,54.943 h1.2 r90; Mechanical 1 "2" at 117.411,57.483 h1.2 r90
J7: Mechanical 1 "1" at 120.587,54.943 h1.2 r90; Mechanical 1 "2" at 120.587,57.483 h1.2 r90
J8: Mechanical 1 "1" at 113.411,96.139 h1.2 r270; Mechanical 1 "2" at 113.411,93.599 h1.2 r270
J9: Mechanical 1 "1" at 120.396,95.631 h1.2; Mechanical 1 "5" at 130.556,95.631 h1.2
J10: Mechanical 1 "1" at 117.411,93.091 h1.2 r90; Mechanical 1 "2" at 117.411,95.631 h1.2 r90
J11: Mechanical 1 "1" at 110.426,96.139 h1.2 r180; Mechanical 1 "2" at 107.886,96.139 h1.2 r180
J12: Mechanical 1 "1" at 133.721,120.269 h1.2 r270; Mechanical 1 "2" at 133.721,117.729 h1.2 r270
U1: Mechanical 1 "1" at 101.458,83.227 h1.2 r270; Mechanical 1 "14" at 101.458,51.028 h1.2 r270; Mechanical 1 "15" at 106.258,51.227 h1.2 r270; Mechanical 1 "28" at 106.158,83.627 h1.2 r270
U2: Mechanical 1 "8" at 109.73,106.802 h0.8 r270; Mechanical 1 "9" at 110.53,105.602 h0.8; Mechanical 1 "16" at 114.63,105.602 h0.8; Mechanical 1 "17" at 115.53,107.403 h0.8 r270; Mechanical 1 "24" at 115.53,111.403 h0.8 r270; Mechanical 1 "25" at 114.73,111.502 h0.8; Mechanical 1 "32" at 111.23,111.403 h0.8
USB1: Mechanical 1 "1" at 88.456,114.935 h1.2 r180; Mechanical 1 "5" at 85.407,114.935 h1.2 r180